# Altium PCB PCB1.PcbDoc
Units mm, origin at the board's own origin, x right, y up, seen from the top; angles counter-clockwise.
Board outline 50 x 100 mm, 2 copper layers (Top Layer, Bottom Layer); 61 components, 66 nets, 281 pads, 55 vias.
Unrouted connection lines stored in the file: 1.
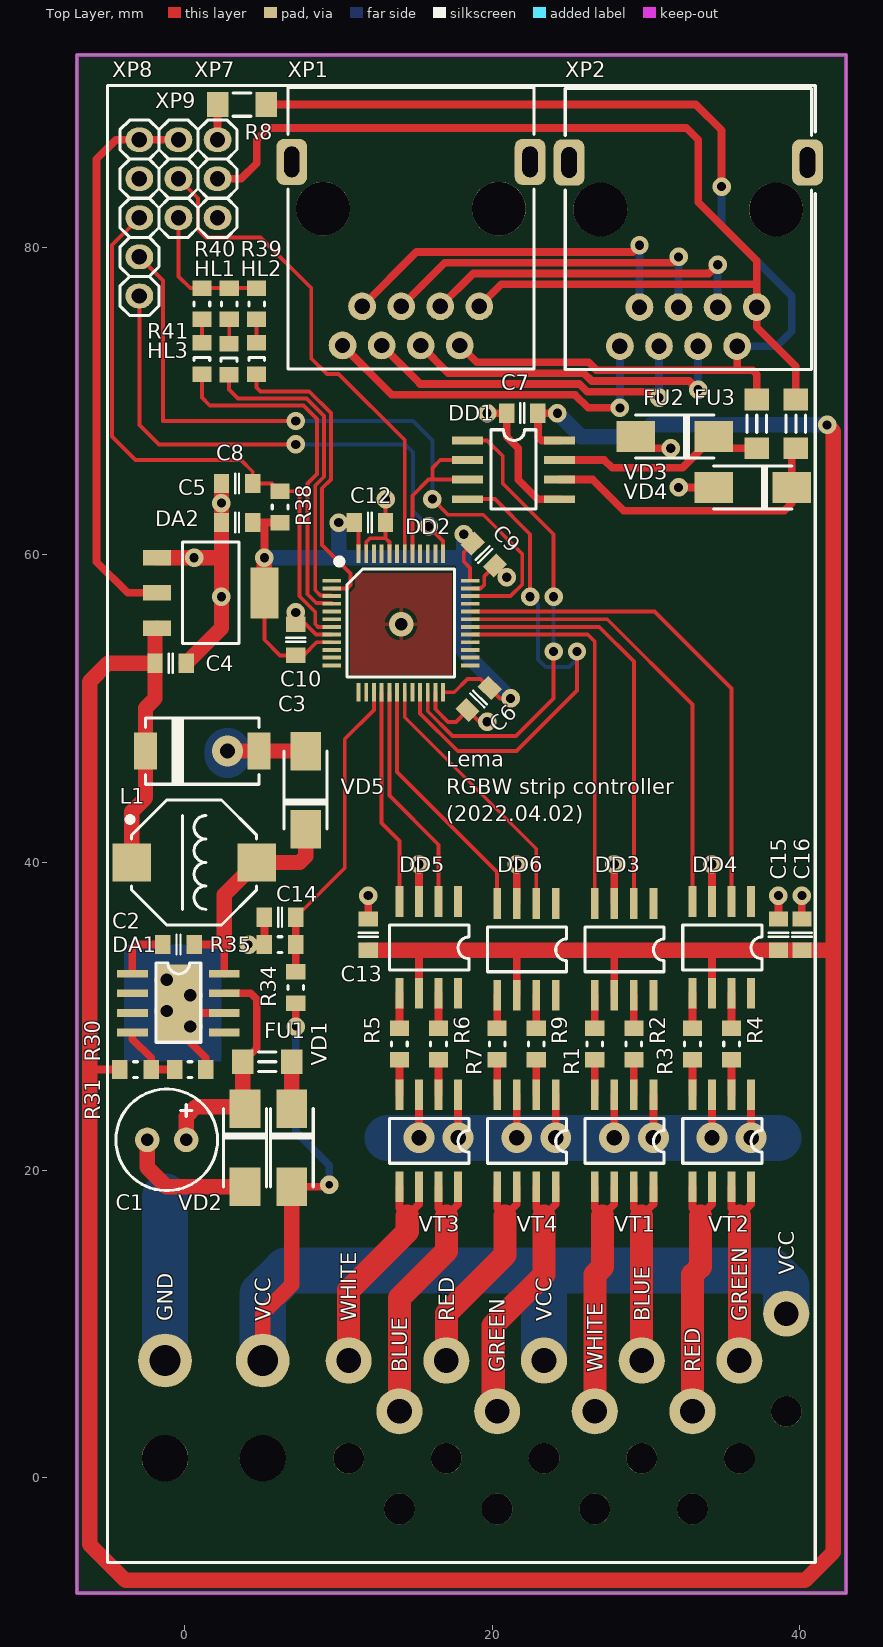
[diagram p0: Top Layer view]
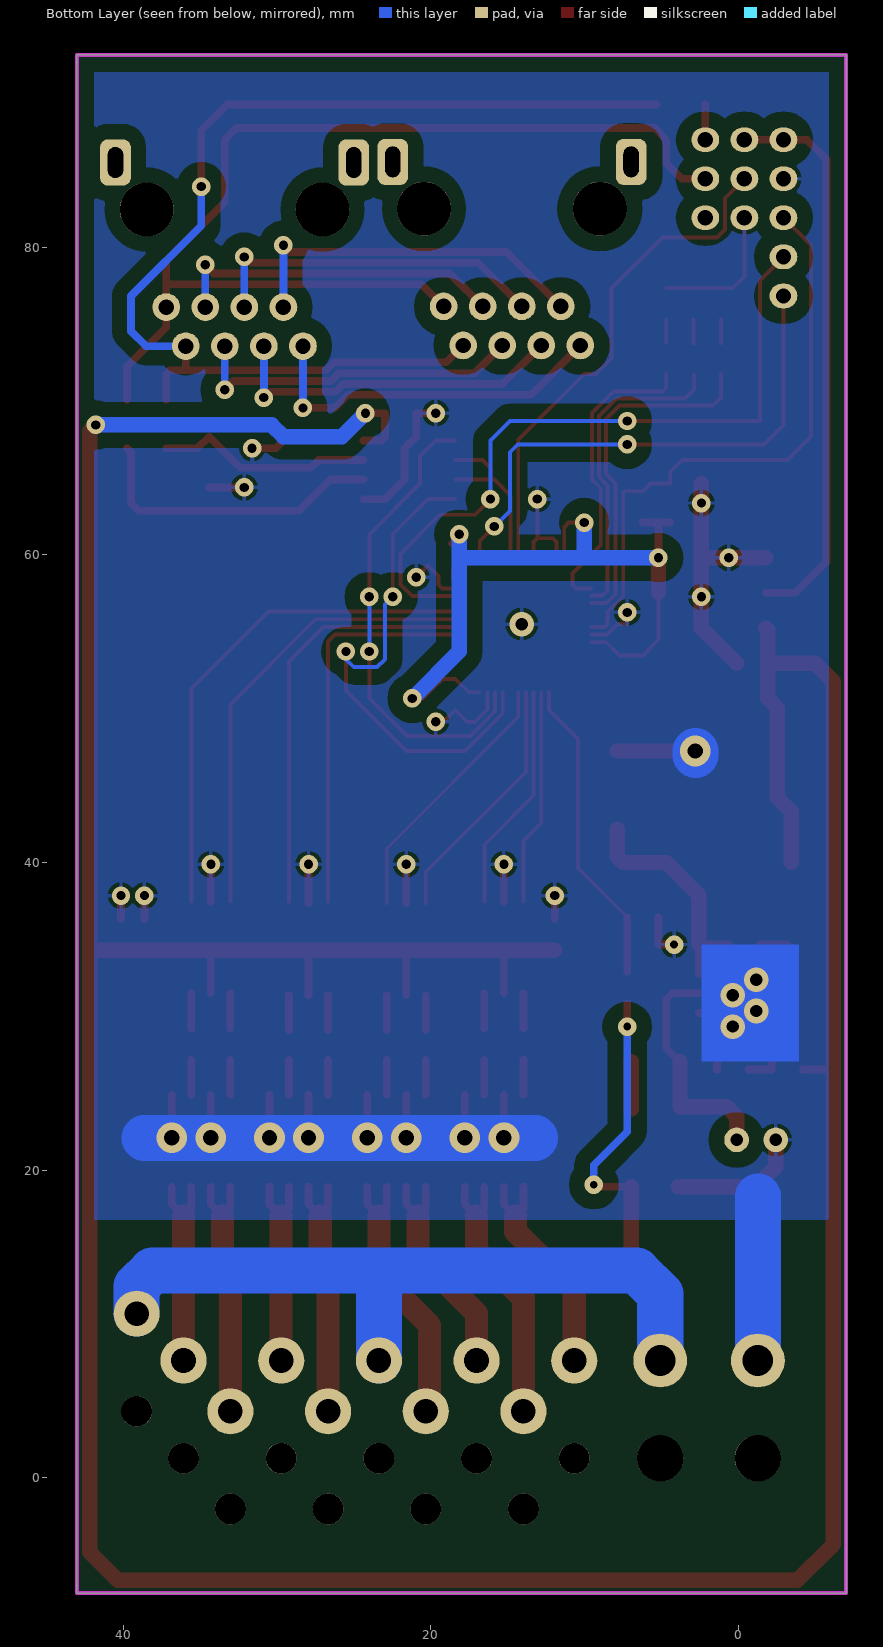
[diagram p1: Bottom Layer view, seen from below]

## Layer stack, top to bottom
Top Solder: solder mask 0.0102, Solder Resist, Dk 3.5
Top Layer: signal copper 0.0356
Dielectric 1: dielectric 0.32, FR-4, Dk 4.8
Bottom Layer: signal copper 0.0356
Bottom Solder: solder mask 0.0102, Solder Resist, Dk 3.5

## Board outline
-7,-7.5 43,-7.5 43,92.5 -7,92.5

## Design rules (kind name [scope] priority, off if disabled: settings)
Clearance Clearance_1 [All vs InNamedPolygon('bot_gnd')] p1: gap=1
Clearance [All] p2: gap=0.2
ComponentClearance [All] p1: gap=0 collisioncheckmode=3 verticalgap=0 showdistances=FALSE
Height [All] p1: minheight=0 maxheight=0 prefheight=0
HoleSize [All] p1: absolutevalues=TRUE maxlimit=11 minlimit=0.025 maxpercent=80.000 minpercent=20.000
HoleToHoleClearance [All] p1: gap=0.01 allowstackedmicrovias=TRUE
MinimumSolderMaskSliver [All] p1: minsoldermaskwidth=0.01
PolygonConnect [All] p1: connectstyle=Relief reliefconductorwidth=0.254 reliefentries=4 polygonreliefangle="90 Angle" airgapwidth=0.254
RoutingVias [All] p1: holewidth=0.5 width=1 viastyle="Through Hole" minholewidth=0.5 minwidth=1 maxholewidth=11 maxwidth=21
SilkToSilkClearance [All] p1: silktosilkclearance=0.01
SilkToSolderMaskClearance [IsPad] p1: minsilkscreentomaskgap=0.01 clearancetoexposedcopper=TRUE
SolderMaskExpansion [All] p1: expansion=0.102
UnpouredPolygon [All] p1: allowunpoured=FALSE
Width [All] p1: maxlimit=5 minlimit=0.2 preferedwidth=0.25
22 further rules are at their usual default settings.

## Components (designator, comment, footprint, x,y, rotation, side; value= is the part's Value field where it differs from the comment)
C1 "100u 35V" "Cap electro d6.3x2.54mm" -2.428,21.964 r0 top
C2 "10n" "Cap Ceramic 0805" -1.412,34.664 r0 top
C3 "100u" "TECap D" 4.826,47.244 r180 top
C4 "1u" "Cap Ceramic 0805" 0.112,52.952 r180 top
C5 "1u" "Cap Ceramic 0805" 2.398,62.096 r0 top
C6 "100n" "Cap Ceramic 0805" 18.4,49.904 r45 top
C7 "100n" "Cap Ceramic 0805" 20.94,69.208 r0 top
C8 "100n" "Cap Ceramic 0805" 2.398,64.636 r0 top
C9 "100n" "Cap Ceramic 0805" 20.178,59.302 r135 top
C10 "100n" "Cap Ceramic 0805" 7.224,55.492 r270 top
C12 "100n" "Cap Ceramic 0805" 13.066,62.096 r180 top
C13 "1u" "Cap Ceramic 0805" 11.938,36.322 r270 top
C14 "100n" "Cap Ceramic 0805" 5.192,36.442 r0 top
C15 "1u" "Cap Ceramic 0805" 38.608,36.322 r270 top
C16 "1u" "Cap Ceramic 0805" 40.132,36.322 r270 top
DA1 "TPS5430" "SO8 S1.27W6.00 GP" -3.393,32.759 r0 top
DA2 "LM1117IMP-3.3" SOT-232 -1.793,59.81 r270 top
DD1 "ADM485" "SO8 S1.27W6.00" 18.4,67.43 r0 top
DD2 "STM32F103CBT6" "TQFP48 S0.5" 9.562,58.564 r0 top
DD3 "IR4427" "SO8 S1.27W6.00" 30.48,37.338 r270 top
DD4 "IR4427" "SO8 S1.27W6.00" 36.83,37.465 r270 top
DD5 "IR4427" "SO8 S1.27W6.00" 17.78,37.465 r270 top
DD6 "IR4427" "SO8 S1.27W6.00" 24.13,37.338 r270 top
FU1 "FSMD010-1206" "Fuse 1206" 6.97,27.044 r180 top
FU2 "FSMD010-1206" "Fuse 1206" 37.196,70.097 r270 top
FU3 "FSMD010-1206" "Fuse 1206" 39.736,70.097 r270 top
HL1 "LED" "LED 0805" 4.684,71.748 r90 top
HL2 "LED" "LED 0805" 2.89,71.694 r90 top
HL3 "LED" "LED 0805" 1.128,71.748 r90 top
L1 "CDRH8D43NP-101NC" CDRH8D43NP-xxxNC -3.444,39.998 r0 top
R1 "10R" "Resistor 0805" 26.67,27.178 r90 top
R2 "10R" "Resistor 0805" 29.21,27.178 r90 top
R3 "10R" "Resistor 0805" 33.02,27.178 r90 top
R4 "10R" "Resistor 0805" 35.56,27.178 r90 top
R5 "10R" "Resistor 0805" 13.97,27.178 r90 top
R6 "10R" "Resistor 0805" 16.51,27.178 r90 top
R7 "10R" "Resistor 0805" 20.32,27.178 r90 top
R8 "100R" "Resistor 1206" 2.144,89.274 r0 top
R9 "10R" "Resistor 0805" 22.86,27.178 r90 top
R30 "10k" "Resistor 0805" -4.206,26.536 r0 top
R31 "2k4" "Resistor 0805" -0.65,26.536 r0 top
R34 "10k" "Resistor 0805" 7.224,30.854 r90 top
R35 "1k" "Resistor 0805" 7.224,34.664 r180 top
R38 "10k" "Resistor 0805" 6.208,62.096 r90 top
R39 "1k" "Resistor 0805" 4.684,75.304 r90 top
R40 "1k" "Resistor 0805" 2.906,75.304 r90 top
R41 "1k" "Resistor 0805" 1.128,75.304 r90 top
VD1 "SS14" "DO-214AC SMA" 6.97,23.996 r270 top
VD2 "SMAJ30CA" "DO-214AC SMA" 3.922,23.996 r270 top
VD3 "SMAJ10CA" "DO-214AC SMA" 34.402,67.684 r180 top
VD4 "SMAJ10CA" "DO-214AC SMA" 39.482,64.382 r180 top
VD5 "SS14" "DO-214AC SMA" 7.874,42.164 r90 top
VT1 "IRF7351" "SO8 S1.27W6.00" 30.48,24.892 r270 top
VT2 "IRF7351" "SO8 S1.27W6.00" 36.83,24.892 r270 top
VT3 "IRF7351" "SO8 S1.27W6.00" 17.78,24.892 r270 top
VT4 "IRF7351" "SO8 S1.27W6.00" 24.13,24.892 r270 top
XP1 "RJ45 8P8C" "RJ45 8P8C" 19.16,76.15 r180 top
XP2 "RJ45 8P8C" "RJ45 8P8C" 37.192,76.102 r180 top
XP7 "Pins 1x3" "Pins 1x3" 2.144,81.908 r90 top
XP8 "Pins 1x5" "Pins 1x5" -2.936,86.988 r270 top
XP9 "Pins 1x3" "Pins 1x3" -0.396,86.988 r270 top

## Footprints (in the part's own frame and the unit in brackets; to place one, negate y for a bottom-side part, rotate by r counter-clockwise, add the part's x,y. Pads: shape width x height; smd on the part's side, far side on the other; paste and mask are expansions set on the pad)
"Cap Ceramic 0805" [mm]
  rect 1x1.25 smd: 1(0,0) 2(2.032,0)
  silkscreen extent 0.89,-0.64 1.14,0.64
"Cap electro d6.3x2.54mm" [mm]
  round 1.6 hole 0.8: 1(0,0) 2(2.54,0)
  silkscreen extent -2.03,-3.3 4.57,3.3
CDRH8D43NP-xxxNC [mm]
  rect 2.5x2.5 smd: 1(0,0) 2(8.128,0)
  silkscreen extent -0.35,-4.06 8.13,4.06
"DO-214AC SMA" [mm]
  rect 2.5x2 smd: 1(5.08,0) 2(0,0)
  silkscreen extent 0,-1.4 5.08,1.4
"Fuse 1206" [mm]
  rect 1.4x1.6 smd: 1(0,0) 2(3.175,0)
  silkscreen extent 1.02,-0.63 2.16,0.64
"LED 0805" [mm]
  rect 1x1.25 smd: 1(0,0) 2(2.032,0)
  silkscreen extent 0.89,-0.51 1.09,0.51
"Pins 1x3" [mm]
  oval 1.6x1.8 hole 1: 1(0,0) 2(2.54,0) 3(5.08,0)
  silkscreen extent -1.27,-1.27 6.35,1.27
"Pins 1x5" [mm]
  oval 1.6x1.8 hole 1: 1(0,0) 2(2.54,0) 3(5.08,0) 4(7.62,0) 5(10.16,0)
  silkscreen extent -1.27,-1.27 11.43,1.27
"Resistor 0805" [mm]
  rect 1x1.25 smd: 1(0,0) 2(2.032,0)
  silkscreen extent 0.89,-0.51 1.14,0.51
"Resistor 1206" [mm]
  rect 1.4x1.6 smd: 1(0,0) 2(3.175,0)
  silkscreen extent 1.02,-0.76 2.16,0.76
"RJ45 8P8C" [mm]
  rrect50% 2x3 hole 1 slot 2 at 90 deg unplated: 0(-3.302,-9.398) 0(12.192,-9.398)
  round 3.5 hole 3.5 unplated: 0(-1.27,-6.35) 0(10.16,-6.35)
  round 1.8 hole 1: 1(0,0) 2(1.27,2.54) 3(2.54,0) 4(3.81,2.54) 5(5.08,0) 6(6.35,2.54) 7(7.62,0) 8(8.89,2.54)
  silkscreen extent -3.56,-14.22 12.45,4.06
"SO8 S1.27W6.00" [mm]
  rect 2x0.5 smd: 1(0,0) 2(0,-1.27) 3(0,-2.54) 4(0,-3.81) 5(5.969,-3.81) 6(5.969,-2.54) 7(5.969,-1.27) 8(5.969,0)
  silkscreen extent 1.52,-4.44 4.44,0.7
"SO8 S1.27W6.00 GP" [mm]
  rect 2x0.5 smd: 1(0,0) 2(0,-1.27) 3(0,-2.54) 4(0,-3.81) 5(5.969,-3.81) 6(5.969,-2.54) 7(5.969,-1.27) 8(5.969,0)
  rect 3x5 smd: 9(2.997,-1.905)
  rect 2.6x3.1 on Top Solder: 9(2.997,-1.905)
  silkscreen extent 1.52,-4.45 4.44,0.7
SOT-232 [mm]
  rect 1x1.8 smd: 1(0,0) 2(2.286,0) 3(4.572,0)
  rect 3.3x1.8 smd: 2(2.286,6.985)
  silkscreen extent -1.02,1.65 5.59,5.33
"TECap D" [mm]
  rect 1.5x2.4 smd: 1(0,0) 2(7.366,0)
  silkscreen extent 0,-2.16 7.37,2.16
"TQFP48 S0.5" [mm]
  rect 1.2x0.25 smd: 1(0,-0.25) 2(0,-0.75) 3(0,-1.25) 4(0,-1.75) 5(0,-2.25) 6(0,-2.75) 7(0,-3.25) 8(0,-3.75) 9(0,-4.25) 10(0,-4.75) 11(0,-5.25) 12(0,-5.75) 25(9,-5.75) 26(9,-5.25) 27(9,-4.75) 28(9,-4.25) 29(9,-3.75) 30(9,-3.25) 31(9,-2.75) 32(9,-2.25) 33(9,-1.75) 34(9,-1.25) 35(9,-0.75) 36(9,-0.25)
  rect 0.25x1.2 smd: 13(1.75,-7.5) 14(2.25,-7.5) 15(2.75,-7.5) 16(3.25,-7.5) 17(3.75,-7.5) 18(4.25,-7.5) 19(4.75,-7.5) 20(5.25,-7.5) 21(5.75,-7.5) 22(6.25,-7.5) 23(6.75,-7.5) 24(7.25,-7.5) 37(7.25,1.5) 38(6.75,1.5) 39(6.25,1.5) 40(5.75,1.5) 41(5.25,1.5) 42(4.75,1.5) 43(4.25,1.5) 44(3.75,1.5) 45(3.25,1.5) 46(2.75,1.5) 47(2.25,1.5) 48(1.75,1.5)
  silkscreen extent 0.2,-6.5 8,1.3

## Part data
C1: library part ECap
C2 C4 C5 C6 C7 C8 C9 C10 C12 C13 C14 C15 C16: library part CerCap
C3: library part TECap
DA2: library part LM1117IMP-x.x
DD2: library part STM32F100C4T6
FU1 FU2 FU3: library part FSMDxxx-1206
L1: library part CDRH8D43NP-xxxNC
R1 R2 R3 R4 R5 R6 R7 R9 R30 R31 R34 R35 R38 R39 R40 R41: library part "Resistor 0,125W"
R8: library part "Resistor 0,25W"
VD2 VD3 VD4: library part SMAJxxCA

## Free pads (board coordinates)
  round 3 hole 3 unplated paste-100: 0(-1.27,1.27) 0(5.08,1.27)
  round 2 hole 2 unplated paste-100: 0(10.668,1.27) 0(13.97,-2.032) 0(17.018,1.27) 0(20.32,-2.032) 0(23.368,1.27) 0(26.67,-2.032) 0(29.718,1.27) 0(33.02,-2.032) 0(36.068,1.27) 0(39.116,4.318)
  round 3.5 hole 2 paste-100: 2(-1.27,7.62) 2(5.08,7.62)
  round 3 hole 1.6 paste-100: 2(10.668,7.62) 2(13.97,4.318) 2(17.018,7.62) 2(20.32,4.318) 2(23.368,7.62) 2(26.67,4.318) 2(29.718,7.62) 2(33.02,4.318) 2(36.068,7.62) 2(39.116,10.668)

## Via types
v1: diameter 1.2, hole 0.6, Top Layer to Bottom Layer, tented both sides, 38 vias
v2: diameter 2, hole 1, Top Layer to Bottom Layer, tented both sides, 9 vias
v3: diameter 1.6, hole 0.8, Top Layer to Bottom Layer, tented both sides, 5 vias
v4: diameter 1.2, hole 0.5, Top Layer to Bottom Layer, tented both sides, 3 vias

## Nets (pads, with @x,y where several pads share a name; then routed paths per layer and width w, separated by ;. In a path a pad name is that pad's centre, name@x,y a point inside that pad or via, vN(x,y) a via of type N, cw(c..) or ccw(c..) an arc to the next point about the centre after c; other vN are vias at no path point)
+3V3: C5.2 C6.2 C9.2 C10.2 C12.2 DA2.2 DD2.9 DD2.24 DD2.36 DD2.48 R38.1 XP8.1 XP9.1 | length 90.6
  Top Layer w0.25: DA2.2@5.192,57.524 5.192,54.476 6.208,53.46 C10.2 7.732,53.46 8.586,54.314 DD2.9 ; v1(10.018,62.096) C12.2 11.312,61.818 DD2.48 ; DD2.24 17.528,51.064 18.4,51.936 19.242,51.936 C6.2 20.512,50.666 v1(21.194,50.666) ; v1(18.146,61.334) C9.2 18.146,60.144 18.146,59.556 18.562,59.14 DD2.36
  Top Layer w0.5: DA2.2@-1.793,57.524 -3.698,57.524 -5.73,59.556 -5.73,85.718 -4.46,86.988 XP8.1 XP9.1 ; C5.2 5.192,62.096 ; v1(5.192,59.81) 5.192,62.096 ; R38.1 5.192,62.096
  Top Layer w1: DA2.2@5.192,57.524 v1(5.192,59.81)
  Bottom Layer w1: v1(5.192,59.81) 18.146,59.81 ; 10.018,59.81 v1(10.018,62.096) ; v1(18.146,61.334) 18.146,59.81 ; v1(21.194,50.666) 18.146,53.714 18.146,59.81
+6V3: C3.2 C4.2 C7.2 C13.2 C15.2 C16.2 DA2.3 DD1.8 DD3.6 DD4.6 DD5.6 DD6.6 L1.1 R30.1 | length 266.7
  Top Layer w0.5: -6.173,26.536 R30.1 ; DD5.6 15.24,34.29 ; DD6.6 21.59,34.29 ; v1(24.242,69.208) C7.2 22.972,67.684 23.226,67.43 DD1.8 ; DD3.6 27.94,34.29 ; DD4.6 34.29,34.29
  Top Layer w1: L1.1 -3.444,43.292 -2.54,44.196 C3.2 -2.54,50.038 -1.92,50.658 C4.2 ; DA2.3 -1.92,55.111 C4.2 ; C13.2 15.24,34.29 21.59,34.29 27.94,34.29 34.29,34.29 37.592,34.29 39.624,34.29 42.173,34.29 ; v1(41.768,68.446) 42.173,68.041 42.173,34.29 ; C4.2 -4.968,52.952 -6.173,51.747 -6.173,26.536 -6.173,-4.327 -3.827,-6.673 40.327,-6.673 42.173,-4.827 42.173,34.29
  Bottom Layer w1: v1(24.242,69.208) 25.766,67.684 29.576,67.684 30.338,68.446 v1(41.768,68.446)
A_RS485: FU3.1 XP1.1 XP2.1 XP7.2 | length 72
  Top Layer w0.5: XP7.2 3.668,84.448 4.684,85.464 4.684,86.988 5.446,87.75 32.624,87.75 33.386,86.988 33.386,82.924 37.192,79.118 37.192,77.59 ; XP1.1 20.6,77.59 37.192,77.59 ; FU3.1 39.736,72.256 37.192,74.8 XP2.1 37.192,77.59
B1_OUT: pad.2@29.718,7.62 VT1.7 VT1.8 | length 13.7
  Top Layer w0.5: VT1.7 29.21,17.526 29.718,17.018 30.48,17.78 VT1.8
  Top Layer w1.5: pad.2@29.718,7.62 29.718,17.018
B1_PWM: DD2.30 DD3.2 | length 27.2
  Top Layer w0.25: DD2.30 26.96,55.314 29.21,53.064 DD3.2@29.21,37.465
B2_OUT: pad.2@13.97,4.318 VT3.7 VT3.8 | length 18.3
  Top Layer w0.5: VT3.7 16.51,17.526 17.018,17.018 17.78,17.78 VT3.8
  Top Layer w1.5: pad.2@13.97,4.318 13.97,11.684 17.018,14.732 17.018,17.018
B2_PWM: DD2.17 DD5.2 | length 14.9
  Top Layer w0.25: DD2.17 13.312,44.346 16.51,41.148 DD5.2
B_RS485: FU2.1 R8.2 XP1.2 XP2.2 | length 72.5
  Top Layer w0.5: R8.2 33.226,89.274 34.91,87.59 v1(34.91,83.94) ; XP1.2 18.99,72.51 26.274,72.51 26.782,72.002 35.926,72.002 ; XP2.2 35.926,73.558 35.926,72.002 ; FU2.1 37.196,71.748 36.942,72.002 35.926,72.002
  Bottom Layer w0.5: v1(34.91,83.94) 34.91,81.4 39.482,76.828 39.482,74.542 38.502,73.562 XP2.2
FB: DA1.4 R30.2 R31.1 | length 4.4
  Top Layer w0.5: DA1.4 -3.393,28.517 -2.174,27.298 R30.2 R31.1
G1_OUT: pad.2@36.068,7.62 VT2.7 VT2.8 | length 13.7
  Top Layer w0.5: VT2.7 35.56,17.526 36.068,17.018 36.83,17.78 VT2.8
  Top Layer w1.5: pad.2@36.068,7.62 36.068,17.018
G1_PWM: DD2.32 DD4.2 | length 32.9
  Top Layer w0.25: DD2.32 30.554,56.314 35.56,51.308 DD4.2
G2_OUT: pad.2@20.32,4.318 VT4.7 VT4.8 | length 18.5
  Top Layer w0.5: VT4.7 22.86,17.526 23.368,17.018 24.13,17.78 VT4.8
  Top Layer w1.5: pad.2@20.32,4.318 20.066,4.572 20.066,9.906 23.368,13.208 23.368,17.018
G2_PWM: DD2.19 DD6.2 | length 17.3
  Top Layer w0.25: DD2.19 14.312,49.442 22.86,40.894 DD6.2
GND: C1.1 C3.1 C4.1 C5.1 C6.1 C7.1 C8.1 C9.1 C10.1 C12.1 C13.1 C14.1 C15.1 C16.1 DA1.6 DA1.9@-0.396,30.854 DA2.1 DD1.5 DD2.8 DD2.23 DD2.35 DD2.44 DD2.47 DD3.3 DD4.3 DD5.3 DD6.3 pad.2@-1.27,7.62 R31.2 R35.2 R39.2 R40.2 R41.2 VD2.1 VD3.1 VD4.1 VD5.1 VT1.1 VT1.3 VT2.1 VT2.3 VT3.1 VT3.3 VT4.1 VT4.3 XP8.2 XP9.3 | length 153.5
  Top Layer w0.25: XP9.3 -0.396,78.098 0.366,77.336 R41.2 R40.2 R39.2 ; v1(7.224,56.254) C10.1 7.858,55.492 8.536,54.814 DD2.8 ; DD2.47 11.812,60.842 12.05,61.08 13.066,61.08 ; v1(13.066,63.62) C12.1 13.066,61.08 ; DD2.44 13.312,60.834 13.066,61.08 ; DD2.23 16.312,49.963 17.133,49.142 17.638,49.142 C6.1 19.162,49.142 v1(19.67,49.142) ; DD2.35 19.247,57.814 19.487,58.054 19.487,58.611 C9.1 v1(20.94,58.54)
  Top Layer w0.5: DA1.9@0.239,30.219 DA1.6 ; v3(0.366,29.33) 0.366,28.314 1.382,27.298 R31.2 ; v4(4.176,34.664) R35.2 C14.1 ; C13.1 v1(11.938,37.846) ; v2(15.24,22.098) VT3.3 ; DD5.3 v1(15.24,39.878) ; v2(17.78,22.098) VT3.1 ; v1(19.67,69.208) C7.1 20.94,67.684 21.702,66.922 21.702,64.89 22.972,63.62 DD1.5 ; v2(21.59,22.098) VT4.3 ; DD6.3 v1(21.59,39.878) ; v2(24.13,22.098) VT4.1 ; v2(27.94,22.098) VT1.3 ; DD3.3 v1(27.94,39.878) ; VD3.1 30.084,66.922 v1(31.608,66.922) ; v2(30.48,22.098) VT1.1 ; v1(32.116,64.382) VD4.1 ; v2(34.29,22.098) VT2.3 ; DD4.3 v1(34.29,39.878) ; v2(36.83,22.098) VT2.1 ; C15.1 v1(38.608,37.846) ; C16.1 v1(40.132,37.846)
  Top Layer w1: C1.1 -2.428,20.186 -1.158,18.916 VD2.1 ; DA2.1 v1(0.62,59.81) 2.398,59.81 ; C4.1 2.398,55.238 2.398,59.81 ; C8.1 C5.1 2.398,59.81 ; v2(2.794,47.244) C3.1 VD5.1
  Bottom Layer w3: pad.2@-1.27,7.62 -1.27,18.288 ; v2@2.794,46.99 v2(2.794,47.244) ; 13.208,22.098 v2(15.24,22.098) v2(17.78,22.098) v2(21.59,22.098) v2(24.13,22.098) v2(27.94,22.098) v2(30.48,22.098) v2(34.29,22.098) v2(36.83,22.098) 38.608,22.098
  other v1: 2.398,57.27 2.398,63.366
  other v3: -1.158,30.346 0.366,31.362 -1.158,32.378 14.082,55.492
"LED 1": DD2.2 HL1.1 | length 19.9
  Top Layer w0.25: HL1.1 4.684,70.87 4.938,70.616 8.105,70.616 9.51,69.211 9.51,64.89 8.944,64.324 8.944,60.63 10.78,58.794 10.78,58.032 10.562,57.814 DD2.2
"LED 2": DD2.3 HL2.1 | length 20.6
  Top Layer w0.25: HL2.1 2.89,70.748 3.472,70.166 7.918,70.166 9.06,69.024 9.06,65.076 8.494,64.51 8.494,57.697 8.827,57.364 9.512,57.364 DD2.3
"LED 3": DD2.4 HL3.1 | length 23.1
  Top Layer w0.25: HL3.1 1.128,70.224 1.636,69.716 7.732,69.716 8.61,68.838 8.61,65.263 7.986,64.639 7.986,57.437 8.559,56.864 9.562,56.864 DD2.4
NetC1_2: C1.2 DA1.7 FU1.2 VD2.2 | length 15.1
  Top Layer w0.5: DA1.7 4.303,31.489 4.684,31.108 4.684,27.933 FU1.2
  Top Layer w1: C1.2 0.112,23.488 0.747,24.123 3.795,24.123 FU1.2
NetC2_1: C2.1 DA1.1 | length 3.8
  Top Layer w0.5: DA1.1 -3.393,34.461 -3.19,34.664 C2.1
NetC2_2: C2.2 DA1.8 L1.2 VD5.2 | length 15.2
  Top Layer w0.5: C2.2 2.576,34.664 DA1.8
  Top Layer w1: 2.576,34.664 2.576,37.89 L1.2 7.486,39.998 7.874,40.386 VD5.2
NetDD1_6: DD1.6 FU3.2 VD4.2 | length 19.8
  Top Layer w0.5: DD1.6 26.528,64.89 28.56,62.858 38.974,62.858 39.482,63.366 VD4.2 39.482,66.668 FU3.2
NetDD1_7: DD1.7 FU2.2 VD3.2 | length 14.2
  Top Layer w0.5: DD1.7 27.29,66.16 27.798,65.652 32.37,65.652 VD3.2 35.164,66.922 FU2.2
NetDD3_5: DD3.5 R1.2 | length 2.3
  Top Layer w0.5: R1.2@26.67,29.083 DD3.5
NetDD3_7: DD3.7 R2.2 | length 2.3
  Top Layer w0.5: R2.2@29.21,29.083 DD3.7
NetDD4_5: DD4.5 R3.2 | length 2.3
  Top Layer w0.5: R3.2 DD4.5
NetDD4_7: DD4.7 R4.2 | length 2.3
  Top Layer w0.5: R4.2 DD4.7
NetDD5_5: DD5.5 R5.2 | length 2.3
  Top Layer w0.5: R5.2 DD5.5
NetDD5_7: DD5.7 R6.2 | length 2.3
  Top Layer w0.5: R6.2 DD5.7
NetDD6_5: DD6.5 R7.2 | length 2.3
  Top Layer w0.5: R7.2@20.32,29.083 DD6.5
NetDD6_7: DD6.7 R9.2 | length 2.3
  Top Layer w0.5: R9.2@22.86,29.083 DD6.7
NetFU1_1: FU1.1 VD1.2 | length 3
  Top Layer w1: VD1.2 FU1.1
NetHL1_2: HL1.2 R39.1 | length 1.5
  Top Layer w0.25: HL1.2 R39.1
NetHL2_2: HL2.2 R40.1 | length 1.6
  Top Layer w0.25: HL2.2@2.906,73.742 R40.1
NetHL3_2: HL3.2 R41.1 | length 1.5
  Top Layer w0.25: HL3.2 R41.1
NetR1_1: R1.1 VT1.4 | length 2.3
  Top Layer w0.5: VT1.4 R1.1
NetR2_1: R2.1 VT1.2 | length 2.3
  Top Layer w0.5: VT1.2 R2.1
NetR3_1: R3.1 VT2.4 | length 2.3
  Top Layer w0.5: VT2.4 R3.1
NetR4_1: R4.1 VT2.2 | length 2.3
  Top Layer w0.5: VT2.2 R4.1
NetR5_1: R5.1 VT3.4 | length 2.3
  Top Layer w0.5: VT3.4 R5.1
NetR6_1: R6.1 VT3.2 | length 2.3
  Top Layer w0.5: VT3.2 R6.1
NetR7_1: R7.1 VT4.4 | length 2.3
  Top Layer w0.5: VT4.4 R7.1
NetR8_1: R8.1 XP7.3 | length 2.3
  Top Layer w0.5: XP7.3 R8.1
NetR9_1: R9.1 VT4.2 | length 2.3
  Top Layer w0.5: VT4.2 R9.1
NetXP1_3: XP1.3 XP2.3 | length 21.9
  Top Layer w0.5: XP1.3 18.76,78.29 34.086,78.29 v1(34.656,78.86)
  Bottom Layer w0.5: XP2.3 34.652,78.856 v1(34.656,78.86)
NetXP1_4: XP1.4 XP2.4 | length 22.1
  Top Layer w0.5: XP1.4 17.15,71.81 25.958,71.81 26.466,71.302 32.816,71.302 v1(33.386,70.732)
  Bottom Layer w0.5: XP2.4 33.382,70.736 v1(33.386,70.732)
NetXP1_5: XP1.5 XP2.5 | length 22.6
  Top Layer w0.5: XP1.5 16.92,78.99 31.738,78.99 v1(32.116,79.368)
  Bottom Layer w0.254: v1@32.112,79.364 v1(32.116,79.368)
  Bottom Layer w0.5: XP2.5 v1@32.112,79.364
NetXP1_6: XP1.6 XP2.6 | length 22.8
  Top Layer w0.5: XP1.6 15.31,71.11 25.668,71.11 26.176,70.602 30.468,70.602 v1(30.846,70.224)
  Bottom Layer w0.5: XP2.6 30.842,70.228 v1(30.846,70.224)
NetXP1_7: XP1.7 XP2.7 | length 23.7
  Top Layer w0.5: XP1.7 15.08,79.69 29.136,79.69 v1(29.576,80.13)
  Bottom Layer w0.5: XP2.7 v1@29.572,80.13
NetXP1_8: XP1.8 XP2.8 | length 23.9
  Top Layer w0.5: XP1.8 13.47,70.41 25.378,70.41 26.236,69.552 v1(28.306,69.552)
  Bottom Layer w0.5: XP2.8 28.302,69.466 28.306,69.462 v1(28.306,69.552)
R1_OUT: pad.2@33.02,4.318 VT2.5 VT2.6 | length 17.2
  Top Layer w0.5: VT2.5 33.02,17.526 33.528,17.018 34.29,17.78 VT2.6
  Top Layer w1.5: pad.2@33.02,4.318 33.02,13.208 33.528,13.716 33.528,17.018
R1_PWM: DD2.31 DD4.4 | length 29.6
  Top Layer w0.25: DD2.31 27.476,55.814 33.02,50.27 DD4.4
R2_OUT: pad.2@17.018,7.62 VT4.5 VT4.6 | length 15.3
  Top Layer w0.5: VT4.5 20.32,17.526 20.828,17.018 21.59,17.78 VT4.6
  Top Layer w1.5: pad.2@17.018,7.62 17.018,10.668 20.828,14.478 20.828,17.018
R2_PWM: DD2.18 DD6.4 | length 16.4
  Top Layer w0.25: DD2.18 13.812,45.878 20.32,39.37 DD6.4
RS485_DEFAULT: DD2.42 XP9.2 | length 33
  Top Layer w0.25: XP9.2 0.874,83.178 0.874,81.146 1.382,80.638 4.938,80.638 8.24,77.336 8.24,72.764 9.256,71.748 10.018,71.748 14.312,67.454 DD2.42
RST: C8.2 DD2.7 R38.2 XP8.3 | length 39.2
  Top Layer w0.25: XP8.3 -4.714,80.13 -4.714,67.684 -3.19,66.16 3.668,66.16 4.43,65.398 C8.2 5.7,64.636 R38.2 7.406,64.128 7.478,64.056 7.478,57.308 8.494,56.292 8.494,55.492 8.672,55.314 DD2.7
RX: DD1.1 DD2.22 | length 30.9
  Top Layer w0.25: DD2.22 15.812,49.826 17.421,48.217 21.539,48.217 23.988,50.666 v1(23.988,53.714) ; DD1.1 19.67,67.43 20.686,66.414 20.686,64.636 23.988,61.334 v1(23.988,57.27)
  Bottom Layer w0.25: v1(23.988,53.714) v1(23.988,57.27)
RX/TX: DD1.2 DD1.3 DD2.41 | length 11.1
  Top Layer w0.25: DD2.41 14.812,63.842 15.86,64.89 16.114,64.89 ; DD1.3 16.114,64.89 ; DD1.2 16.622,66.16 16.114,65.652 16.114,64.89
SWCLK: DD2.37 XP8.5 | length 34.3
  Top Layer w0.25: XP8.5 -2.936,68.446 -1.666,67.176 v1(7.224,67.176) ; v1(15.86,61.842) 16.812,60.89 DD2.37
  Bottom Layer w0.25: v1(7.224,67.176) 14.336,67.176 14.844,66.668 14.844,62.858 v1(15.86,61.842)
SWDIO: DD2.34 XP8.4 | length 46.2
  Top Layer w0.25: XP8.4 -1.412,77.844 -1.412,68.7 v1(7.224,68.7) ; v1(16.114,63.62) 17.13,62.604 19.416,62.604 21.956,60.064 21.956,58.07 21.2,57.314 DD2.34
  Bottom Layer w0.25: v1(7.224,68.7) 14.844,68.7 16.114,67.43 v1(16.114,63.62)
TX: DD1.4 DD2.21 | length 33.6
  Top Layer w0.25: DD2.21 15.312,49.69 17.758,47.244 21.582,47.244 25.512,51.174 v1(25.512,53.714) ; DD1.4 20.178,63.62 22.464,61.334 v1(22.464,57.27)
  Bottom Layer w0.25: v1(22.464,57.27) 22.972,56.762 22.972,53.206 23.48,52.698 25.004,52.698 25.512,53.206 v1(25.512,53.714)
VCC: pad.2@5.08,7.62 pad.2@23.368,7.62 pad.2@39.116,10.668 R34.1 VD1.1 | length 74.3
  Top Layer w0.5: VD1.1 9.264,18.916 v4(9.398,19.05) ; v4(7.224,29.33) R34.1
  Top Layer w1: pad.2@5.08,7.62 5.08,10.668 6.97,12.558 VD1.1
  Bottom Layer w0.5: v4(7.224,29.33) 7.224,22.494 9.398,20.32 v4(9.398,19.05)
  Bottom Layer w3: pad.2@5.08,7.62 5.08,11.938 6.604,13.462 23.368,13.462 ; pad.2@23.368,7.62 23.368,13.462 ; pad.2@39.116,10.668 39.116,12.446 38.1,13.462 23.368,13.462
VCC_ADC: C14.2 DD2.15 R34.2 R35.1 | length 20.3
  Top Layer w0.25: C14.2 10.414,39.632 10.414,48.014 12.312,49.912 DD2.15
  Top Layer w0.5: R34.2 R35.1 C14.2
W1_OUT: pad.2@26.67,4.318 VT1.5 VT1.6 | length 17.2
  Top Layer w0.5: VT1.5 26.67,17.526 27.178,17.018 27.94,17.78 VT1.6
  Top Layer w1.5: pad.2@26.67,4.318 26.67,13.208 27.178,13.716 27.178,17.018
W1_PWM: DD2.29 DD3.4 | length 25.2
  Top Layer w0.25: DD2.29 26.212,54.814 26.67,54.356 DD3.4@26.67,37.465
W2_OUT: pad.2@10.668,7.62 VT3.5 VT3.6 | length 15.3
  Top Layer w0.5: VT3.5 13.97,17.526 14.478,17.018 15.24,17.78 VT3.6
  Top Layer w1.5: pad.2@10.668,7.62 10.668,12.192 14.478,16.002 14.478,17.018
W2_PWM: DD2.16 DD5.4 | length 14.1
  Top Layer w0.25: DD2.16 12.812,42.56 13.97,41.402 DD5.4
pads on no net: DA1.2 DA1.3 DA1.5 DA1.9@-0.396,30.854 DD2.1 DD2.5 DD2.6 DD2.10 DD2.11 DD2.12 DD2.13 DD2.14 DD2.20 DD2.25 DD2.26 DD2.27 DD2.28 DD2.33 DD2.38 DD2.39 DD2.40 DD2.43 DD2.45 DD2.46 DD3.1 DD3.8 DD4.1 DD4.8 DD5.1 DD5.8 DD6.1 DD6.8 XP1.0 XP2.0 XP7.1

## Polygon pours and split planes (outlines as drawn)
GND on Top Layer "top_mcu" (solid, pour order 4): 10.78,52.19 10.78,58.794 17.384,58.794 17.384,52.19 10.78,52.19
GND on Bottom Layer "bot_gnd" (solid, pour order 6): -7,92.5 -7,16.764 43,16.764 43,92.5

## Keep-outs
Keep-Out Layer:
  the board outline again, w0.254

## Other copper
Bottom Layer:
  rectangle net GND: -3.952,27.044 2.398,34.664

## Silkscreen, mask and mechanical layers (free items; w line width, h text height)
Top Overlay:
  lines w0.2: 41,83.5 41,-5.5 -5,-5.5 -5,90.5 41,90.5 41,87.5
  text "Lema" at 17.018,46.228 h1
  text "RGBW strip controller" at 17.018,44.45 h1
  text "(2022.04.02)" at 17.018,42.672 h1
  text "VCC" at 39.624,13.208 h1 r90
  text "GND" at -0.762,10.16 h1 r90
  text "VCC" at 5.588,10.16 h1 r90
  text "WHITE" at 11.176,10.16 h1 r90
  text "RED" at 17.526,10.16 h1 r90
  text "VCC" at 23.876,10.16 h1 r90
  text "BLUE" at 30.226,10.16 h1 r90
  text "GREEN" at 36.576,10.16 h1 r90
  text "BLUE" at 14.478,6.858 h1 r90
  text "GREEN" at 20.828,6.858 h1 r90
  text "WHITE" at 27.178,6.858 h1 r90
  text "RED" at 33.528,6.858 h1 r90